# Altium PCB ESP32-with-USB_V0.1.PcbDoc (part 3 of 3)
Units mil, origin at the board's own origin, x right, y up, seen from the top; angles counter-clockwise.
Board outline 2720 x 1080 mil, 2 copper layers (TOP, BOTTOM); 64 components, 73 nets, 299 pads, 189 vias.
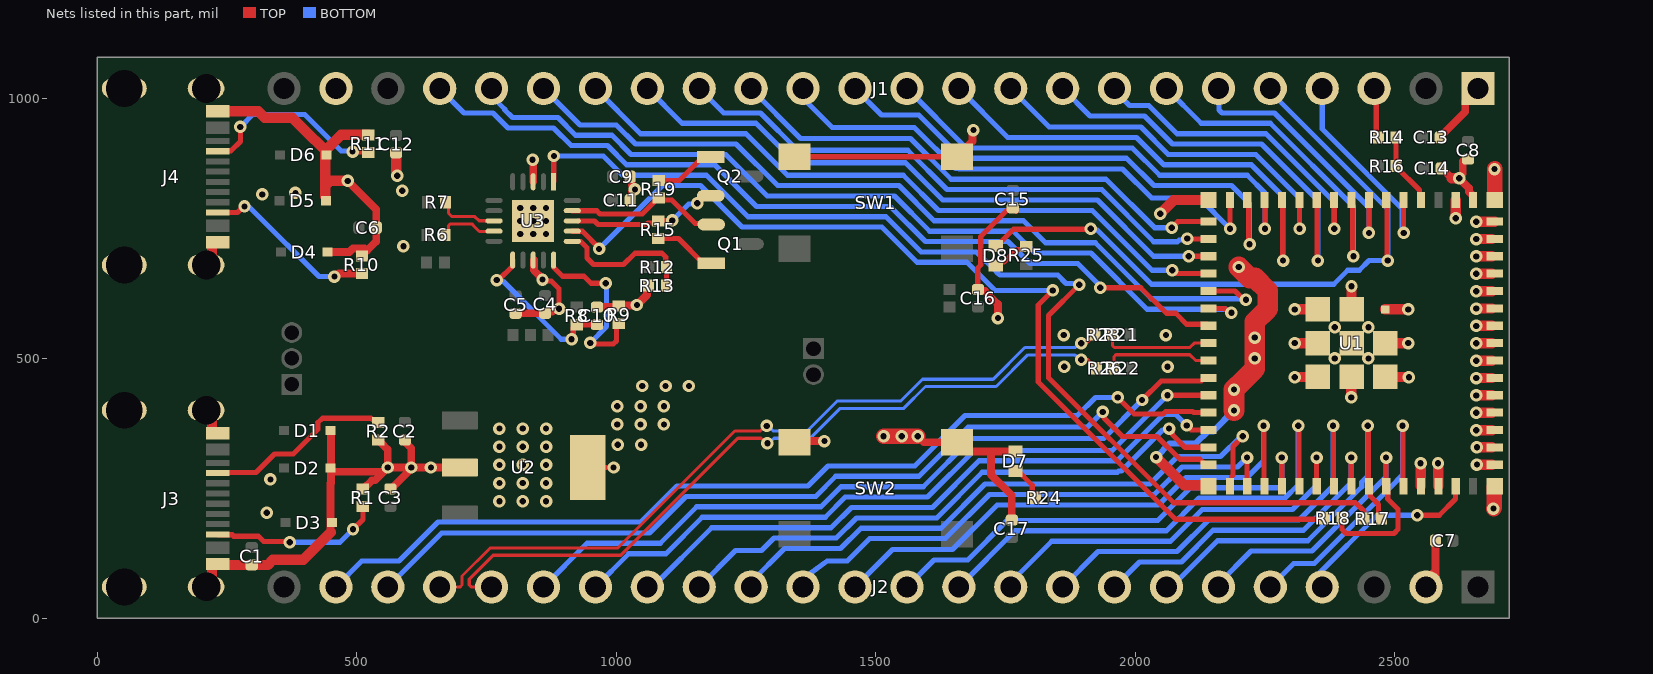
[diagram p2: the nets of this part, all layers, seen from the top]

## Via types
v1: diameter 24, hole 12, TOP to BOTTOM, tented both sides, 189 vias

## Nets (pads, with @x,y where several pads share a name; then routed paths per layer and width w, separated by ;. In a path a pad name is that pad's centre, name@x,y a point inside that pad or via, vN(x,y) a via of type N, cw(c..) or ccw(c..) an arc to the next point about the centre after c; other vN are vias at no path point) (continued)
CON_ESP_USB_N: J2.21 R23.1 | length 1481.5
  TOP w6.03: J2.21@660,60 699.45,60 702.98,63.53 702.98,80.87 757.14,135.03 1003.19,135.03 1228.56,360.4 1277.48,360.4 1287.08,370 v1(1290,370) ; v1(1896,529.5) 1905.5,529.5 R23.1@1922,546
  BOTTOM w6.03: v1(1290,370) 1292.92,370 1302.52,360.4 1368.01,360.4 1425.61,418 1548,418 1590,460 1726.09,460 1787.13,521.04 1878.34,521.04 1878.49,520.9 1883.48,520.9 1892.08,529.5 v1(1896,529.5)
CON_ESP_USB_P: J2.20 R26.1 | length 1461.6
  TOP w6.03: J2.20@760,60 720.55,60 717.02,63.53 717.02,75.06 762.95,121 1009,121 1234.37,346.37 1278.8,346.37 1288.4,336.77 v1(1291.32,336.77) ; v1(1896,497.5) 1908.48,497.5 R26.1@1924.98,481
  BOTTOM w6.03: v1(1291.32,336.77) 1294.24,336.77 1303.84,346.37 1373.82,346.37 1431.42,403.97 1553.81,403.97 1595.81,445.97 1731.9,445.97 1792.95,507.01 1872.53,507.01 1872.68,506.87 1883.1,506.87 1892.47,497.5 v1(1896,497.5)
CON_GPIO0: J1.3 R14.1 | length 97.7
  TOP w10: J1.3@2460,1020 2464.11,1015.89 2464.11,929.85 R14.1@2468.22,925.75
DTR_FTDI: Q2.2 R15.1 U3.18 | length 271.2
  TOP w10: U3.18@926.94,764.77 958.42,764.77 965,758.19 975,758.19 1058.3,758.19 1061.1,760.99 1076.94,760.99 R15.1@1080.84,764.89 ; R15.1@1081.4,765.45 1107.45,765.45 v1(1108,766) ; v1(1156,799) 1156,800.82 1168.37,813.2 Q2.2@1182,813.2
  BOTTOM w10: v1(1108,766) 1139.86,797.86 v1@1146.86,797.86
ESP_USB_N: R21.2 R23.2 U1.23 | length 211.1
  TOP w6.03: R21.2@1956,546 1956.02,524.67 1959.55,521.13 2105.04,521.13 2113.51,529.61 U1.23@2140.82,529.61
ESP_USB_P: R22.2 R26.2 U1.24 | length 210.4
  TOP w6.03: R26.2@1959,481 1959,503.57 1962.53,507.1 2105.12,507.1 2116.08,496.14 U1.24@2140.82,496.14
FTDI_RESET: C10.2 R8.2 U3.11 | length 316.3
  TOP w10: v1(770,651) 773.35,651 800.63,678.28 U3.11@800.63,689.59 ; v1(914,537) 914,540.79 917.19,543.98 917.19,559.36 922.82,564.99 R8.2@924,564.99 R8.2@924,564.99 962.96,565.03 C10.2@963,565.07
  BOTTOM w10: v1(770,651) 772.68,648.32 782.68,648.32 894,537 v1(914,537)
FTDI_USB_N: R6.2 U3.9 | length 115.9
  TOP w6.23: R6.2@670.01,738 676.97,744.96 676.97,755.51 680.62,759.16 721.84,759.16 728,753 736.43,744.57 749.74,744.57 749.85,744.68 763.95,744.68 U3.9@764.59,745.32
FTDI_USB_P: R7.2 U3.8 | length 117.3
  TOP w6.23: R7.2@671.01,801 677.52,794.49 676.97,793.93 676.97,780.06 683.64,773.39 727.74,773.39 735.81,765.31 U3.8@764.28,765.31
GND: C1.1 C2.1 C3.1 C4.1 C5.1 C6.1 C7.1 C8.1 C9.1 C10.1 C11.1 C12.1 C13.1 C14.1 C15.1 C16.1 C17.1 D1.1 D2.1 D3.1 D4.1 D5.1 D6.1 D7.K- J1.1 J1.23 J2.2 J3.A1B12 J3.B1A12 J3.S1 J3.S2 J3.S3 J3.S4 J4.A1B12 J4.B1A12 J4.S1 J4.S2 J4.S3 J4.S4 R1.2 R2.2 R9.2 R10.2 R11.2 R13.1 SW1.3 SW1.4 SW2.3 SW2.4 U1.1 U1.2 U1.42 U1.43 U1.46 U1.47 U1.48 U1.49 U1.50 U1.51 U1.52 U1.53 U1.54 U1.55 U1.56 U1.57 U1.58 U1.59 U1.60 U1.61 U1.62 U1.63 U1.64 U1.65 U1.66 U1.67 U1.68 U1.69 U1.70 U1.71 U1.72 U1.73 U2.2 U2.4 U3.3 U3.13 U3.21 | length 5682.3
  TOP w10: v1(858,652) 860.68,649.32 874.96,649.32 890,634.28 v1(890,596) ; U2.4@945,290 v1(995,290) ; SW1.4@1343.5,888.58 SW1.3@1656.5,888.58 ; C16.1@1697,632.93 1696.42,633.51 1696.42,674.03 1702.28,679.89 1702.28,734.69 1752.43,784.83 1758.76,784.83 C15.1@1764,790.07 1764.84,790.07 1770.42,784.49 C15.1@1770.42,783.65 ; v1(2549.54,298) v1@2549.9,297.63 ; U1.42@2549.9,254.38 U1.42@2550.27,254.02 ; v1(2583,298) v1@2583.37,297.63 ; U1.43@2583.37,254.38 U1.43@2583.73,254.02
  TOP w15: 419.82,920.18 419.82,921.39 ; D6.1@439.09,900 D6.1@439.88,900 ; D4.1@443.88,705 486,705 493.01,712.01 515,712.01 ; 449.88,165.06 449.88,184 449.88,259.21 450.67,260 D2.1@450.67,282 ; D2.1@450.56,294.68 D1.1@450.56,355.84 ; D2.1@450.67,290 D2.1@450.67,282 ; v1(483,842) 537.93,787.07 537.93,725.55 519.69,707.31 R10.2@510.14,697.76 ; R1.2@512,249.01 513.18,249.01 529.78,265.6 535.6,265.6 v1@552,282 ; R2.2@541.72,342.74 542.9,342.74 546.03,339.62 546.03,338.43 559.97,324.5 v1(560,290) ; C3.1@565,248.86 565,250 567.32,250 605,287.68 v1(605,290) ; C2.1@589,343.07 590.18,343.07 593.31,339.94 593.31,338.76 605,327.07 v1(605,290) ; U2.2@698.94,290 v1(643,290) v1(605,290) ; C5.1@806.65,586.39 C5.1@806.26,586.78 806.4,586.93 862.85,586.93 C4.1@863,587.07 866.13,590.2 876.16,590.2 880.24,594.28 888.28,594.28 v1(890,596) ; v1(839,883) 840,882 U3.3@840,840.41 ; U3.13@841.41,689.59 841.41,670.26 858,653.67 v1(858,652) ; C10.1@963,598.93 963.09,599.02 1000.19,599.02 1003.41,602.24 1003.65,602 1039,602 v1(1040,603) 1059.38,622.38 1059.38,627.4 1059.38,640.37 R13.1@1060.38,641.37 ; C9.1@1024.85,850.14 1024.85,848.95 1026.03,850.14 C9.1@1026.85,850.14 1029.98,847.01 1029.98,834.02 1036,828 v1(1036,825.56) 1030.06,819.62 1030.06,808.13 C11.1@1026.93,805 ; SW1.4@1334.92,880 SW1.4@1343.15,888.23 ; SW2.4@1343.5,338.58 1345.92,341 v1(1401,341) ; v1(1581,350) 1592.42,338.58 SW2.3@1656.5,338.58 1674.38,320.7 1721.69,320.7 ; SW1.3@1656.5,888.58 1661.42,888.58 1679.51,906.67 1679.51,911.59 1686.28,918.36 1686.28,938.28 v1(1688,940) ; C16.1@1700.83,629.8 1710.16,629.8 1735.28,604.68 v1(1735.28,577.72) ; C17.1@1763.07,190 C17.1@1762,188.93 1762,236.22 1721.69,276.54 1721.69,320.7 ; D7.K-@1769,320.7 1721.69,320.7 ; J2.2@2560,60 2560,73.26 2578.07,91.33 ; J2.2@2578.14,81.33 C7.1@2578.14,149 ; C14.1@2587.15,869.57 2609.72,847 ; C13.1@2587.15,925.75 2587.15,926.93 2635.5,975.28 2635.5,995.5 J1.1@2660,1020 ; C8.1@2635,883.07 2633.82,883.07 2630.69,879.94 2630.69,856.12 2624,849.44 v1(2624,847) 2624,846.76 2642.57,828.19 2642.57,821.16 2650.66,813.07 U1.1@2650.66,805.2 ; D2.1@450.67,282 v1@552,282 ; v1@552,282 v1(560,290) v1(605,290)
  TOP w20: J3.S2@210,60 212.37,60 221.32,68.95 221.32,102.28 223.13,104.09 J3.B1A12@232.64,104.09 234.45,102.28 254.76,102.28 254.97,102.07 C1.1@298,102.07 328.53,102.07 338.46,112 396.83,112 449.88,165.06 ; J3.S1@210,400.16 212.37,400.16 221.32,391.21 221.32,357.87 223.13,356.06 J3.A1B12@232.64,356.06 ; J4.S2@210,680 212.37,680 221.32,688.95 221.32,722.28 223.13,724.09 J4.B1A12@232.64,724.09 J4.B1A12@243.46,724.09 ; J4.A1B12@232.64,976.06 310.86,976.06 322.92,964 376,964 419.21,920.79 ; 419.82,920.18 439.09,900.91 D6.1@439.09,900 ; D5.1@439.88,812.8 439.88,832.88 ; v1(483,842) 449,842 439.88,832.88 ; R11.2@522.23,930.66 470.54,930.66 439.88,900 439.88,832.88 ; C12.1@576,896.07 576,855.15 578,853.15 v1(578,852.07) ; v1(2040,310) 2093.99,256.01 2138.82,256.01 U1.63@2140.82,254.02 ; v1(2048,779) 2074.2,805.2 U1.62@2140.82,805.2 ; v1(2307,464) 2307.32,464.32 2351.13,464.32 U1.73@2351.45,464.65 ; v1(2307,529.61) U1.72@2351.45,529.61 ; v1(2307,594.57) U1.71@2351.45,594.57 ; v1(2416,425) 2416.2,425.2 2416.2,464.44 U1.70@2416.41,464.65 ; U1.68@2416.41,594.57 v1(2416.41,639.02) ; U1.67@2481.37,464.65 2481.69,464.32 2526.68,464.32 v1(2527,464) ; U1.66@2481.37,529.61 v1(2525.82,529.61) ; U1.65@2481.37,594.57 v1(2525.82,594.57) ; U1.42@2549.9,254.38 v1@2549.9,297.63 ; U1.43@2583.37,254.38 v1@2583.37,297.63 ; 2609.72,847 v1(2624,847) ; U1.2@2617.2,805.2 2617.2,770.36 v1(2617.4,770.15) ; v1(2656.75,361.88) 2656.96,362.08 U1.48@2686.25,362.08 ; v1(2656.75,395.34) 2656.96,395.54 U1.49@2686.25,395.54 ; v1(2656.75,428.8) 2656.96,429.01 U1.50@2686.25,429.01 ; v1(2656.75,462.27) 2656.96,462.47 U1.51@2686.25,462.47 ; v1(2656.75,495.73) 2656.96,495.94 U1.52@2686.25,495.94 ; v1(2656.75,529.2) 2656.96,529.4 U1.53@2686.25,529.4 ; v1(2656.75,562.66) 2656.96,562.87 U1.54@2686.25,562.87 ; v1(2656.75,596.13) 2656.96,596.33 U1.55@2686.25,596.33 ; v1(2656.75,629.59) 2656.96,629.8 U1.56@2686.25,629.8 ; v1(2656.75,663.06) 2656.96,663.26 U1.57@2686.25,663.26 ; v1(2656.75,696.52) 2656.96,696.73 U1.58@2686.25,696.73 ; v1(2656.75,729.99) 2656.96,730.19 U1.59@2686.25,730.19 ; v1(2656.75,763.45) 2656.96,763.65 2691.8,763.65 U1.60@2692,763.86 ; v1(2658,295.54) 2658.09,295.44 U1.46@2686.25,295.44 ; v1(2658,329) 2658.09,328.91 U1.47@2686.25,328.91
  TOP w30: v1(1515,350) v1(1550,350) v1(1581,350) ; v1@2690,211 2691.25,212.25 2691.25,253.27 U1.64@2692,254.02 ; U1.61@2692,805.2 v1@2692,865
  TOP w40: v1(2190,400) v1(2190,440) 2210,460 2230,480 v1(2230,500) v1(2230,540.26) 2230,570.6 2255,595.6 2255,630.4 2230.4,655 2220.3,655 v1(2199.09,676.2)
  BOTTOM w12: v1(2040,310) 2066.34,336.34 2116.34,336.34 2140,360 2150,360 v1(2190,400) v1(2190,440)
  other v1: 327,203 2689.8,210.8 775,225 820,225 865,225 775,260 820,260 865,260 334,267 775,295 820,295 865,295 775,330 820,330 865,330 1003,334 1048,334 775,365 820,365 865,365 1002,373 1047,373 1092,373 1002,408 1047,408 1092,408 1050,447 1095,447 1140,447 1863,484 2062,484 2384,500 2449,500 1862,545 2059,545 2384,560 2449,560 590,716 815,740 840,740 865,740 815,765 840,765 865,765 815,790 840,790 865,790 318,816 382,819 588,823 2691.8,864.8
GPIO0: R14.2 R16.2 U1.4 | length 138.6
  TOP w10: R16.2@2502.23,870.75 R14.2@2502.23,925.75 ; R16.2@2502.71,869.09 2547.39,824.4 2547.39,808.07 U1.4@2550.27,805.2
GPIO1: J1.4 U1.5 | length 406.5
  TOP w10: v1(2516.8,741.8) U1.5@2516.8,805.2
  BOTTOM w10: J1.4@2360,1020 2360,942 2514.12,787.88 2514.12,744.48 v1(2516.8,741.8)
GPIO2: D8.K- J1.5 U1.6 | length 1378
  TOP w10: D8.K-@1731.06,716.66 1733.03,716.66 1765.37,749 1913,749 v1(1914,750) ; U1.6@2483.34,805.2 2484.83,803.71 2484.83,690.12 v1(2486.31,688.63)
  BOTTOM w10: v1(1914,750) 1916.68,747.32 1926.61,747.32 2030.93,643 2382.21,643 2409.21,670 2431.18,670 2449.82,688.63 v1(2486.31,688.63) ; J1.5@2260,1020 2260,1013.72 2486.31,787.4 v1@2486.31,685.81
GPIO3: J1.6 U1.7 | length 520.9
  TOP w10: v1(2449.87,741.8) U1.7@2449.87,805.2
  BOTTOM w10: J1.6@2160,1020 2161,1019 2161,978.86 2166.86,973 2268,973 2449.87,791.13 v1(2449.87,741.8)
GPIO4: J1.7 U1.8 | length 659.5
  TOP w10: U1.8@2416.41,805.2 2418.2,803.4 2418.2,698.8 v1(2420,697)
  BOTTOM w10: J1.7@2060,1020 2127,953 2259.72,953 2420,792.72 v1(2420,697)
GPIO5: J1.8 U1.9 | length 627.3
  TOP w10: v1(2383.35,750) U1.9@2383.35,810
  BOTTOM w10: J1.8@1960,1020 1960,1016.18 1988.83,987.36 2025.64,987.36 2080,933 2251.43,933 2365.72,818.72 2383.16,801.27 2383.16,750.19 v1(2383.35,750)
GPIO6: J1.9 U1.10 | length 823.7
  TOP w10: U1.10@2349.74,813.24 2350.54,812.44 2350.54,689.73 v1(2351.6,688.66)
  BOTTOM w10: J1.9@1860,1020 1912.64,967.36 2017.36,967.36 2071.72,913 2243.15,913 2351.6,804.54 v1(2351.6,688.66) v1@2350.48,689.79
GPIO7: J1.10 U1.11 | length 766
  TOP w10: v1(2316.43,750) U1.11@2316.43,813.39
  BOTTOM w10: J1.10@1760,1020 1834.28,945.72 2010.72,945.72 2063.43,893 2232,893 2316.43,808.57 v1(2316.43,750)
GPIO8: J1.11 U1.12 | length 960
  TOP w10: U1.12@2283.61,812.44 2283.61,689.73 v1(2284.67,688.66)
  BOTTOM w10: J1.11@1660,1020 1754.28,925.72 2002.43,925.72 2055.15,873 2223.72,873 2284.67,812.04 v1(2284.67,688.66) v1@2283.55,689.79
GPIO9: J1.12 U1.13 | length 905.1
  TOP w10: v1(2249.5,750) U1.13@2249.5,813.39
  BOTTOM w10: J1.12@1560,1020 1674.28,905.72 1994.15,905.72 2046.86,853 2215.43,853 2249.5,818.94 v1(2249.5,750)
GPIO10: J1.13 U1.14 | length 1023.8
  TOP w10: U1.14@2216.68,812.44 2217.81,811.32 2217.81,722.19 v1(2220,720)
  BOTTOM w10: J1.13@1460,1020 1511,969 1582.72,969 1666,885.72 1983,885.72 2035.72,833 2185,833 2220,798 v1(2220,720)
GPIO11: J1.14 U1.15 | length 1035.8
  TOP w10: v1(2182.57,750) U1.15@2182.57,813.39
  BOTTOM w10: J1.14@1360,1020 1341,1020 1416,945 1574,945 1653.28,865.72 1660.28,865.72 1660.78,865.22 1975.22,865.22 2031.48,808.95 2123.62,808.95 v1(2182.57,750)
GPIO12: J1.15 U1.16 | length 997.3
  TOP w10: v1(2070,752) 2081.86,763.86 U1.16@2140.82,763.86
  BOTTOM w10: J1.15@1260,1020 1260,1019 1355,924 1566.72,924 1645.5,845.22 1943.6,845.22 2036.82,752 v1(2070,752)
GPIO13: J1.16 U1.17 | length 1105.7
  TOP w10: v1(2100,731) 2100.61,730.39 U1.17@2140.82,730.39
  BOTTOM w10: J1.16@1160,1020 1207,973 1277.72,973 1349.72,901 1561.43,901 1637.22,825.22 1935.32,825.22 2035.53,725 2081.18,725 2084.51,728.32 2097.32,728.32 v1(2100,731)
GPIO14: J1.17 U1.18 | length 1214.6
  TOP w10: v1(2103,697) 2103.07,696.93 U1.18@2140.82,696.93
  BOTTOM w10: J1.17@1060,1020 1127,953 1269.43,953 1345.43,877 1557.15,877 1628.93,805.22 1927.03,805.22 2035.25,697 v1(2103,697)
GPIO15: J1.18 U1.19 | length 1328.5
  TOP w10: v1(2071,670) 2077.54,663.46 U1.19@2140.82,663.46
  BOTTOM w10: J1.18@960,1020 1047,933 1250,933 1330,853 1552.86,853 1620.65,785.22 1917,785.22 2032.22,670 v1(2071,670)
GPIO16: J1.19 U1.20 | length 1604.9
  TOP w10: U1.20@2137.94,627.13 U1.20@2140.82,630 2192.21,630 2209.21,613 v1(2213,613)
  BOTTOM w10: J1.19@860,1020 930,950 1000,950 1037,913 1231,913 1311,833 1544.58,833 1612.36,765.22 1784.78,765.22 1827,723 1922.65,723 2030.65,615 2211,615 v1(2213,613)
GPIO17: J1.20 U1.21 | length 1661
  TOP w10: U1.21@2140.82,596.54 2172.68,596.54 2181.21,588 v1(2185,588)
  BOTTOM w10: J1.20@760,1020 760,1005.39 785.17,980.22 785.17,978.83 800,964 887.72,964 921.72,930 991.72,930 1028.72,893 1211,893 1291,813 1536.29,813 1604.08,745.22 1764.78,745.22 1807,703 1914.36,703 2022.36,595 2174.21,595 2181.21,588 v1(2185,588)
GPIO18: J1.21 U1.22 | length 1672.1
  TOP w10: v1(1932.41,636.41) 2010.41,636.41 2059.82,587 2077.82,587 2098.82,566 2124.21,566 2124.27,565.94 2137.94,565.94 U1.22@2140.82,563.07
  BOTTOM w10: J1.21@660,1020 707,973 762.72,973 791.72,944 879.43,944 913.43,910 983.43,910 1020.43,873 1190,873 1270,793 1528.01,793 1595.79,725.22 1754.78,725.22 1797,683 1889.18,683 1932.41,639.78 v1(1932.41,636.41)
GPIO21: J2.19 U1.25 | length 1447.6
  TOP w10: v1(2013,420) 2049.82,456.82 2127.09,456.82 2130.07,459.8 2137.94,459.8 U1.25@2140.82,462.68
  BOTTOM w10: J2.19@860,60 944,144 1084.72,144 1155,214.28 1394.28,214.28 1433,253 1591.57,253 1684.57,346 1939,346 v1(2013,420)
GPIO26: J2.18 U1.26 | length 1334.9
  TOP w10: v1@2061,430 v1(2061.79,429.21) U1.26@2140.82,429.21
  BOTTOM w10: J2.18@960,60 1024,124 1095.72,124 1165.72,194 1394,194 1394.28,194.28 1402.57,194.28 1441.28,233 1599.85,233 1689.85,323 1955.57,323 v1(2061.79,429.21)
GPIO33: J2.17 U1.28 | length 1231.2
  TOP w10: v1(2099,371) 2107.72,362.28 U1.28@2140.82,362.28 U1.28@2140.46,362.64
  BOTTOM w10: J2.17@1060,60 1070,60 1184,174 1414,174 1453,213 1609.12,213 1699.12,303 1964.82,303 2053.82,392 2078,392 v1(2099,371)
GPIO34: J2.16 U1.29 | length 1125.4
  TOP w10: v1(2065,365) 2065,361.21 2071.27,354.94 2071.27,353.09 2095.54,328.82 U1.29@2140.82,328.82
  BOTTOM w10: J2.16@1160,60 1230,130 1280,130 1304,154 1424,154 1463,193 1617.41,193 1705.19,280.78 1965.78,280.78 1968,283 1973.1,283 2052.42,362.32 2062.32,362.32 v1(2065,365)
GPIO35: J2.15 U1.31 | length 1179.3
  TOP w10: U1.31@2182.16,254.02 2185.03,256.89 2185.03,272.03 2188.21,275.21 2188.21,330.6 2207,349.39 v1(2207,350)
  BOTTOM w10: J2.15@1260,60 1260,70 1324,134 1432.28,134 1471.28,173 1625.69,173 1710.69,258 2028.29,258 2081.29,311 2164.21,311 2203.21,350 v1(2207,350)
GPIO36: J2.14 U1.32 | length 1026.7
  TOP w10: U1.32@2215.21,245.82 v1(2215.21,309.21)
  BOTTOM w10: J2.14@1360,60 1362.46,76.59 1365.32,79.44 1403.85,108.02 1406.5,109.99 1444.98,109.99 1445.48,110.2 1488.28,153 1633.98,153 1718.98,238 2036.57,238 2089.57,291 2197,291 v1(2215.21,309.21)
GPIO37: J2.13 U1.33 | length 1081.1
  TOP w10: v1(2246.96,370.55) 2248.03,369.49 U1.33@2248.03,246.77
  BOTTOM w10: J2.13@1460,60 1532,132 1647.99,132 1733.99,218 2044.86,218 2097.86,271 2215.18,271 2246.96,302.78 v1(2246.96,370.55) v1@2248.09,369.42
GPIO38: J2.12 U1.34 | length 919.4
  TOP w10: U1.34@2282.14,245.82 v1(2282.14,309.21)
  BOTTOM w10: J2.12@1560,60 1612,112 1677,112 1753,188 2043.14,188 2106.14,251 2276.28,251 2282.14,256.86 v1(2282.14,309.21)
GPIO39: J2.11 U1.35 | length 974.9
  TOP w10: v1(2313.89,370.55) 2314.95,369.49 U1.35@2314.95,246.77
  BOTTOM w10: J2.11@1660,60 1768,168 2059.72,168 2122.72,231 2288,231 2313.89,256.89 v1(2313.89,370.55) v1@2315.02,369.42
GPIO40: J2.10 U1.36 | length 792.7
  TOP w10: U1.36@2349.07,245.82 v1(2349.07,309.21)
  BOTTOM w10: J2.10@1760,60 1760,69 1839,148 2068,148 2129,209 2303,209 2349.07,255.07 v1(2349.07,309.21)
GPIO41: J2.9 U1.37 | length 843.3
  TOP w10: v1(2380.82,370.55) 2381.88,369.49 U1.37@2381.88,246.77
  BOTTOM w10: J2.9@1860,60 1928,128 2080.43,128 2141.43,189 2315.43,189 2380.82,254.39 v1(2380.82,370.55) v1@2381.94,369.42
GPIO42: J2.8 U1.38 | length 650.7
  TOP w10: U1.38@2416,245.82 v1(2416,309.21)
  BOTTOM w10: J2.8@1960,60 2008,108 2088.72,108 2149.72,169 2323.72,169 2416,261.28 v1(2416,309.21)
GPIO45: J2.5 U1.41 | length 563.4
  TOP w10: v1(2514.68,370.55) 2515.74,369.49 U1.41@2515.74,246.77
  BOTTOM w10: J2.5@2260,60 2305,105 2344.57,105 2502.93,263.36 2502.93,263.78 2514.68,275.53 v1(2514.68,370.55)
GPIO46: J2.4 U1.44 | length 349.6
  TOP w10: v1(2543,198) 2585.57,198 2616.98,229.4 2616.98,253.79 U1.44@2617.2,254.02
  BOTTOM w10: J2.4@2352.85,85 2465.85,198 v1(2543,198) ; J2.4@2360,59 J2.4@2360,60
GPIO47: J2.23 U1.27 | length 1848.3
  TOP w10: v1(1966,425) 1998,393 2053.5,393 2058.5,398 2110.18,398 2112.44,395.75 U1.27@2140.82,395.75
  BOTTOM w10: J2.23@460,60 510,110 581.72,110 656.72,185 1047.52,185 1116.8,254.28 1369.28,254.28 1408,293 1575,293 1672,390 1888,390 1923,425 v1(1966,425)
GPIO48: J2.22 U1.30 | length 1768.9
  TOP w10: v1(1937,397) 1939.68,394.32 1939.68,385.32 1975,350 2041.82,350 2085.87,305.95 2124.21,305.95 2130.07,300.09 2130.07,298.23 2132.94,295.35 U1.30@2140.82,295.35
  BOTTOM w10: J2.22@560,60 664,164 1064,164 1134.28,234.28 1384.28,234.28 1423,273 1583.28,273 1678.28,368 1908,368 v1(1937,397)
NetD7_A+: D7.A+ R24.2 | length 80.7
  TOP w10: D7.A+@1767,283.3 D7.A+@1771.66,287.96 ; D7.A+@1768,287.3 1769.97,287.3 1801.56,255.71 1801.56,237.4 R24.2@1807.18,231.77 R24.2@1807.18,232.96
NetD8_A+: D8.A+ R25.2 | length 73.8
  TOP w10: D8.A+@1731.06,679.26 1737.87,686.07 1747.28,686.07 1759.84,698.64 1771.42,710.21 1784.69,710.21 R25.2@1789.88,715.4
NetJ3_A5: J3.A5 R2.1 | length 363.7
  TOP w10: J3.A5@232.64,279.29 233.54,280.2 306.2,280.2 342,316 378,316 425.24,363.24 425.24,376.07 434.02,384.86 527.77,384.86 530.24,382.39 536.09,382.39 R2.1@541.72,376.76
NetJ3_B5: J3.B5 R1.1 | length 328.9
  TOP w10: J3.B5@232.64,161.18 233.54,160.28 260.72,160.28 263.44,157.56 311.07,157.56 321.03,147.59 369.41,147.59 v1(371,146) ; v1(493,171) 512,190 R1.1@512,214.99
  BOTTOM w10: v1(371,146) 468,146 v1(493,171)
NetJ4_A5: J4.A5 R11.1 | length 366
  TOP w10: J4.A5@232.64,899.29 233.54,900.2 257.96,900.2 276,918.24 v1(276,946) ; v1(492.23,898.66) 493.24,897.65 521.23,897.65 R11.1@522.23,896.65
  BOTTOM w10: v1(276,946) 300.03,970.03 399.97,970.03 470.32,899.68 489.32,899.68 v1@492,897
NetJ4_B5: J4.B5 R10.1 | length 341.1
  TOP w10: J4.B5@232.64,781.18 232.73,781.09 270.28,781.09 282.19,793 v1(284,793)
  TOP w15: v1(457.14,657.75) 459.58,657.75 465.57,663.74 R10.1@510.14,663.74
  BOTTOM w10: v1(284,793) 286.68,790.32 294.68,790.32 302.36,782.64 427.25,657.75 v1@457.29,657.75
NetQ1_1: Q1.1 R15.2 | length 121.9
  TOP w10: R15.2@1080.84,730.88 1119.87,730.88 1167.55,683.2 Q1.1@1183,683.2
NetQ2_1: Q2.1 R19.2 | length 118.6
  TOP w10: R19.2@1082,843.01 1121.56,843.01 1166.55,888 Q2.1@1182,888
NetR9_1: R9.1 U3.15 | length 340.6
  TOP w10: U3.15@879.37,689.59 879.37,675.63 896.44,658.56 937.65,658.56 951.21,645 v1(980,645) ; v1(950,530) 952,528 994.43,528 1000.28,533.86 R9.1@1000.28,565.1
  BOTTOM w10: v1(950,530) 981.31,561.31 981.31,643.69 v1(980,645)
RTS_FTDI: Q1.2 R19.1 U3.19 | length 304.2
  TOP w10: U3.19@915.41,784.68 962.5,784.68 969,778.19 1050.02,778.19 1080.82,808.99 1084.71,805.1 1107.09,805.1 1152.3,759.89 1181.11,759.89 Q1.2@1183,758
RXD_FTDI: R17.2 U3.1 | length 2094.3
  TOP w10: U3.1@879.37,840.41 879.6,840.64 879.6,872 879.6,889.6 v1(880,890) ; v1(1892,642) 1833,583 1833,462.82 2073.82,222 2424.32,222 2440.37,205.95 R17.2@2440.37,193.63
  BOTTOM w10: v1(880,890) 975.15,890 1012.15,853 1174,853 1254,773 1519.73,773 1587.51,705.22 1693.75,705.22 1733.96,665 1735,665 1739.37,660.63 1850.58,660.63 1866.53,644.68 1889.32,644.68 v1(1892,642)
TXD_FTDI: R18.2 U3.17 | length 1926
  TOP w10: U3.17@915.41,745.32 915.64,745.09 935,745.09 967,713.09 v1(967,711) ; v1(1841,631) 1813,603 1813,454.53 2077.35,190.18 R18.2@2366.17,190.18
  BOTTOM w10: v1(967,711) 1089,833 1162.4,833 1242.4,753 1511.44,753 1579.23,685.22 1675.83,685.22 1730.05,631 v1(1841,631)
U0RXD: J2.6 R18.1 U1.40 | length 734.9
  TOP w10: R18.1@2398.01,192 2398.01,170.99 2406,163 2498,163 2506.01,171.01 2506.01,209.65 2486.21,229.45 2486.21,251.14 U1.40@2483.34,254.02 ; U1.40@2482.93,254.02 v1(2482.93,309.21)
  BOTTOM w10: J2.6@2160,60 2160,66 2223,129 2340.28,129 2482.93,271.64 v1(2482.93,309.21)
U0TXD: J2.7 R17.1 U1.39 | length 761.3
  TOP w10: v1(2447.75,370.55) 2448.81,369.49 U1.39@2448.81,254.02 ; U1.39@2449.87,254.02 2452.75,251.14 2452.75,234.45 2468.38,218.82 2468.38,203.63 R17.1@2474.01,198
  BOTTOM w10: J2.7@2060,60 2069,60 2158,149 2332,149 2436,253 2436,262 2447.75,273.75 v1(2447.75,370.55)
VBUS_SENSE: R12.1 R13.2 U3.16 | length 278.2
  TOP w10: U3.16@915.41,725.63 931.83,725.63 944,713.46 944,713 944,693.33 956.33,681 1014.17,681 1035.98,702.81 1088.19,702.81 1095.5,695.5 1095.5,677.5 R12.1@1097,676 1096.76,675.76 1096.76,640.74 R13.2@1096.52,640.5
pads on no net: J1.24 J2.24 J3.A8 J3.B8 J4.A8 J4.B8 U3.2 U3.4 U3.5 U3.6 U3.7 U3.14

## Polygon pours and split planes (outlines as drawn)
+3V3 on TOP "+3V3_L01_P016" (solid, remove dead copper, pour order 16): 1,11 2701,11 2701,1071 1,1071
+3V3_FTDI on TOP "+3V3_FTDI_L01_P005" (solid, pour order 5): 692.78,639.47 694.31,641 733,641 733,713 735,715 783,715 783,730 781,732 780,731 707,731 707,724 680,697 659,697 659,666 685,640 693,640
GND on TOP "GND_L01_P002" (solid, pour order 2): 2602,834 2602,832 2705,832 2708,829 2709,830 2709,896 2636,896 2617,877 2577,877 2577,859
GND on TOP "GND_L01_P010" (solid, pour order 10): 755,351 755,428 788,428 825,465 1033,465 1058,490 1242,490 1182,424 975,213 774.54,213 727.54,241 688,241 433,241 433,351
GND on TOP "GND_L01_P004" (solid, pour order 4): 2296.04,650 2539,650 2539,434 2539,412 2296,412 2296,650
+5V_VBUS2 on TOP "TOP-+5V_VBUS2" (solid, pour order 7): 292,707 295,537 360,537 364,533 374.25,533 386,533 425,568 425,730 426,729 515,729 515,768 487,768 252,768 252,751 261,742 260,742 260,736
+5V_VBUS1 on TOP "+5V_VBUS1_L01_P011" (solid, pour order 11): 250,341 250,468 251,469 396,469 396,361 362,327 328,327 299,298 263,298 263,323 254,332 254,337
+5V on TOP "+5V_L01_P015" (solid, pour order 15): 734,367 734,525 733,531 402,531 402,456 440,418 545,418 545,417 572,390 572,367
+3V3_REG on TOP "+3V3_REG_L01_P001" (solid, pour order 1): 545,225 740,225 740,140 545,140
+3V3_FTDI on TOP "+3V3_FTDI_L01_P012" (solid, pour order 12): 1003,861 1003,794 900,794 900,861 905,861 904,861 905,861
GND on BOTTOM "GND_L02_P014" (solid, remove dead copper, pour order 14): 2710,1080 2710,0 10,0 10,1080

## Silkscreen, mask and mechanical layers (free items; w line width, h text height)
Top Overlay:
  lines w6: 760,110 760,140 ; 760,930 760,960 ; 1260,110 1260,140 ; 1260,930 1260,960 ; 1760,100 1760,130 ; 1760,930 1760,960 ; 2260,100 2260,130 ; 2260,930 2260,960
  text "J1" at 2300,912 h40
  text "USR" at 1728,858 h40
  text "RESET" at 1418,628 h40
  text "FTDI" at 18,608 h40
  text "USB_1" at 448,564.66 h40
  text "+3V3" at 1178,518 h40
  text "+5V" at 448,488 h40
  text "ESP_USB" at 18,449.66 h40
  text "VREG" at 1178,448 h40
  text "USB_2" at 448,424.66 h40
  text "BOOT/USR" at 1368,398 h40
  text "POWER" at 1738,348 h40
  text "J2" at 2257,141 h40
Bottom Overlay:
  text "NC" at 346,876 h40 r270
  text "IO1" at 2346,856 h40 r270
  text "IO9" at 1546,846 h40 r270
  text "IO8" at 1646,846 h40 r270
  text "IO7" at 1746,846 h40 r270
  text "IO6" at 1846,846 h40 r270
  text "IO5" at 1936,846 h40 r270
  text "IO4" at 2036,846 h40 r270
  text "IO3" at 2136,846 h40 r270
  text "IO2" at 2236,846 h40 r270
  text "IO0" at 2446,846 h40 r270
  text "GND" at 446,836 h40 r270
  text "+5V" at 536,836 h40 r270
  text "GND" at 2646,836 h40 r270
  text "IO11" at 1346,826 h40 r270
  text "IO18" at 636,816 h40 r270
  text "IO17" at 736,816 h40 r270
  text "IO16" at 836,816 h40 r270
  text "IO15" at 936,816 h40 r270
  text "IO14" at 1036,816 h40 r270
  text "IO13" at 1136,816 h40 r270
  text "IO12" at 1236,816 h40 r270
  text "IO10" at 1446,816 h40 r270
  text "+3V3" at 2546,796 h40 r270
  text "<---PIN1--->" at 2646,346 h40 r270
  text "NC" at 336,136 h40 r270
  text "IO47" at 446,136 h40 r270
  text "IO48" at 556,136 h40 r270
  text "D-" at 646,136 h40 r270
  text "D+" at 746,136 h40 r270
  text "IO21" at 846,136 h40 r270
  text "IO26" at 946,136 h40 r270
  text "IO33" at 1046,136 h40 r270
  text "IO34" at 1146,136 h40 r270
  text "IO35" at 1246,136 h40 r270
  text "IO36" at 1346,136 h40 r270
  text "IO37" at 1446,136 h40 r270
  text "IO38" at 1546,136 h40 r270
  text "IO39" at 1646,136 h40 r270
  text "IO40" at 1746,136 h40 r270
  text "IO41" at 1846,136 h40 r270
  text "IO42" at 1946,136 h40 r270
  text "U0TXD" at 2046,136 h40 r270
  text "U0RXD" at 2146,136 h40 r270
  text "IO45" at 2246,136 h40 r270
  text "IO46" at 2346,136 h40 r270
  text "EN" at 2446,136 h40 r270
  text "GND" at 2546,136 h40 r270
  text "+3V3" at 2646,136 h40 r270